# Altium PCB SchaltmichAus.PcbDoc
Units mm, origin at the board's own origin, x right, y up, seen from the top; angles counter-clockwise.
Board outline 104.14 x 59.91 mm, 2 copper layers (Top Layer, Bottom Layer); 20 components, 16 nets, 111 pads, 9 vias.
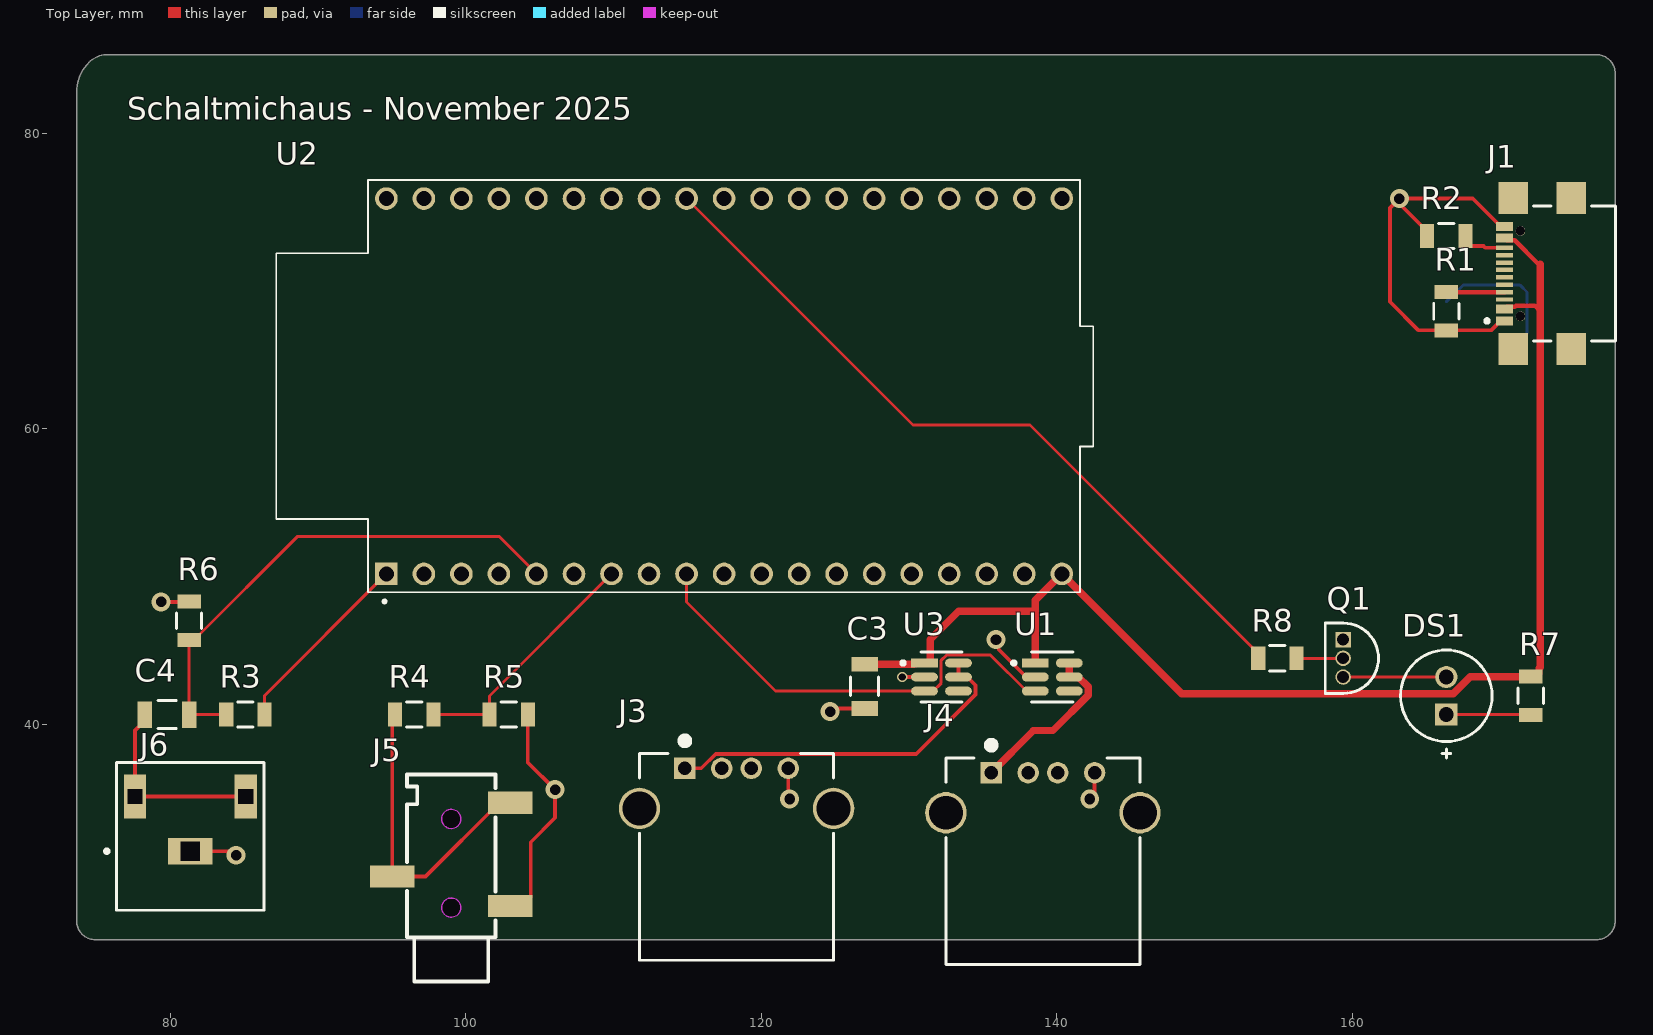
[diagram p0: Top Layer view]
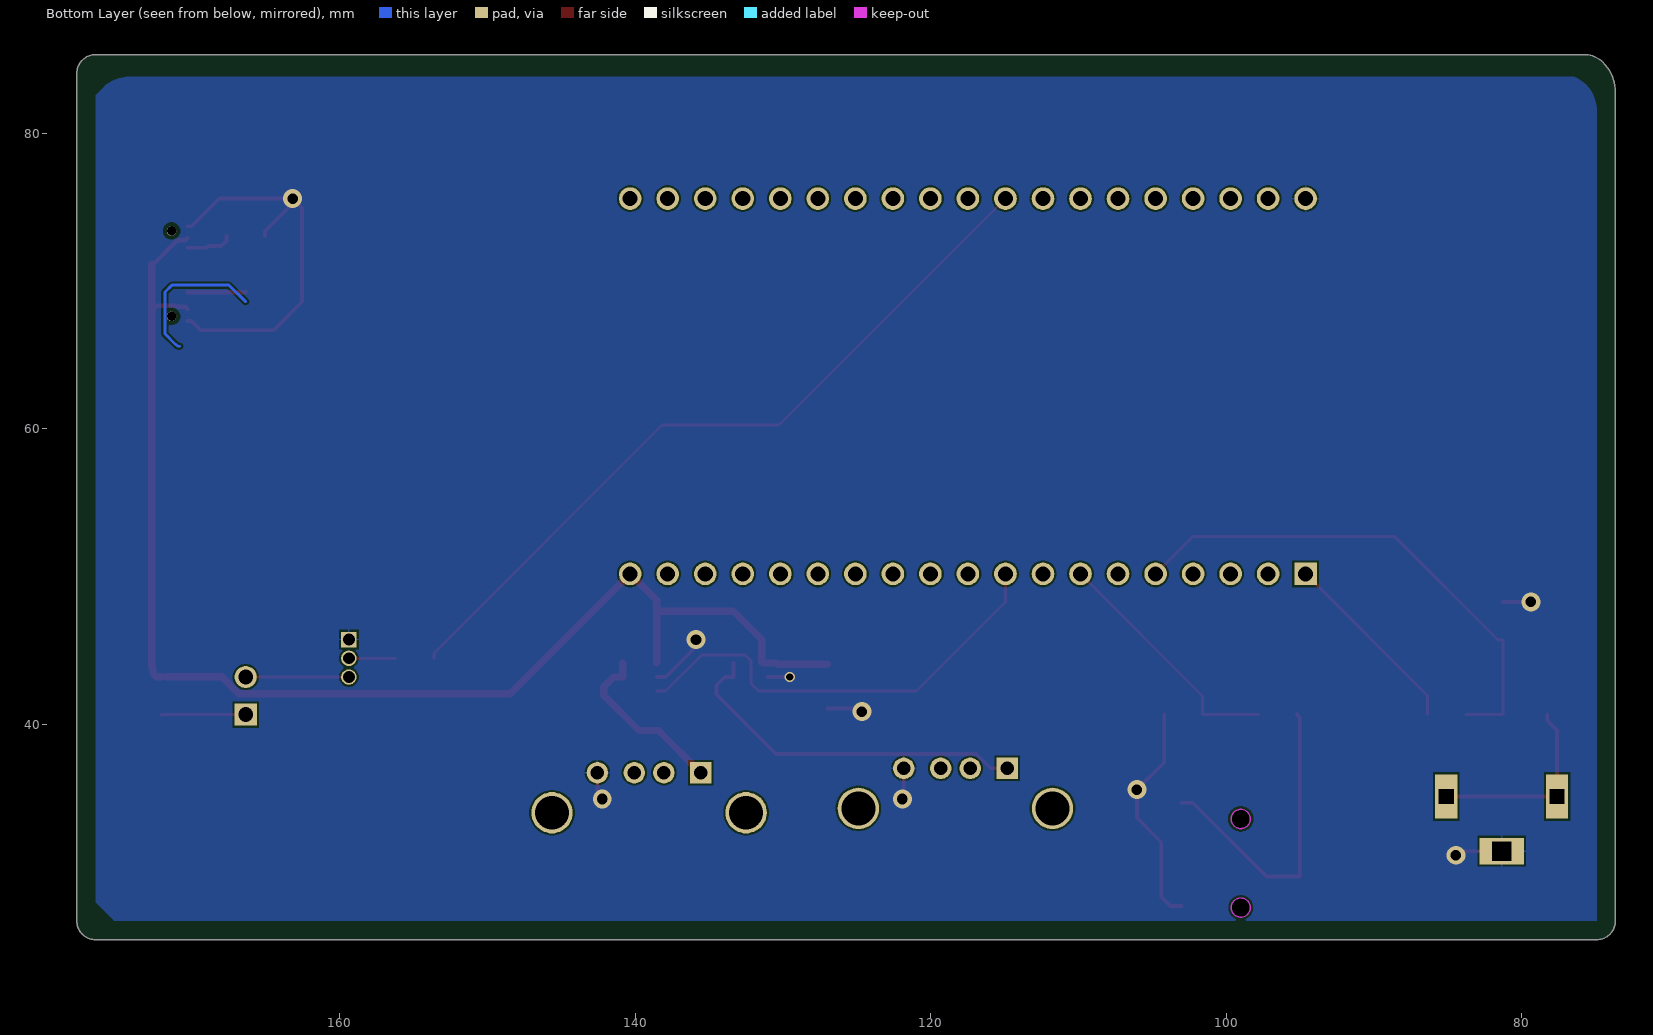
[diagram p1: Bottom Layer view, seen from below]
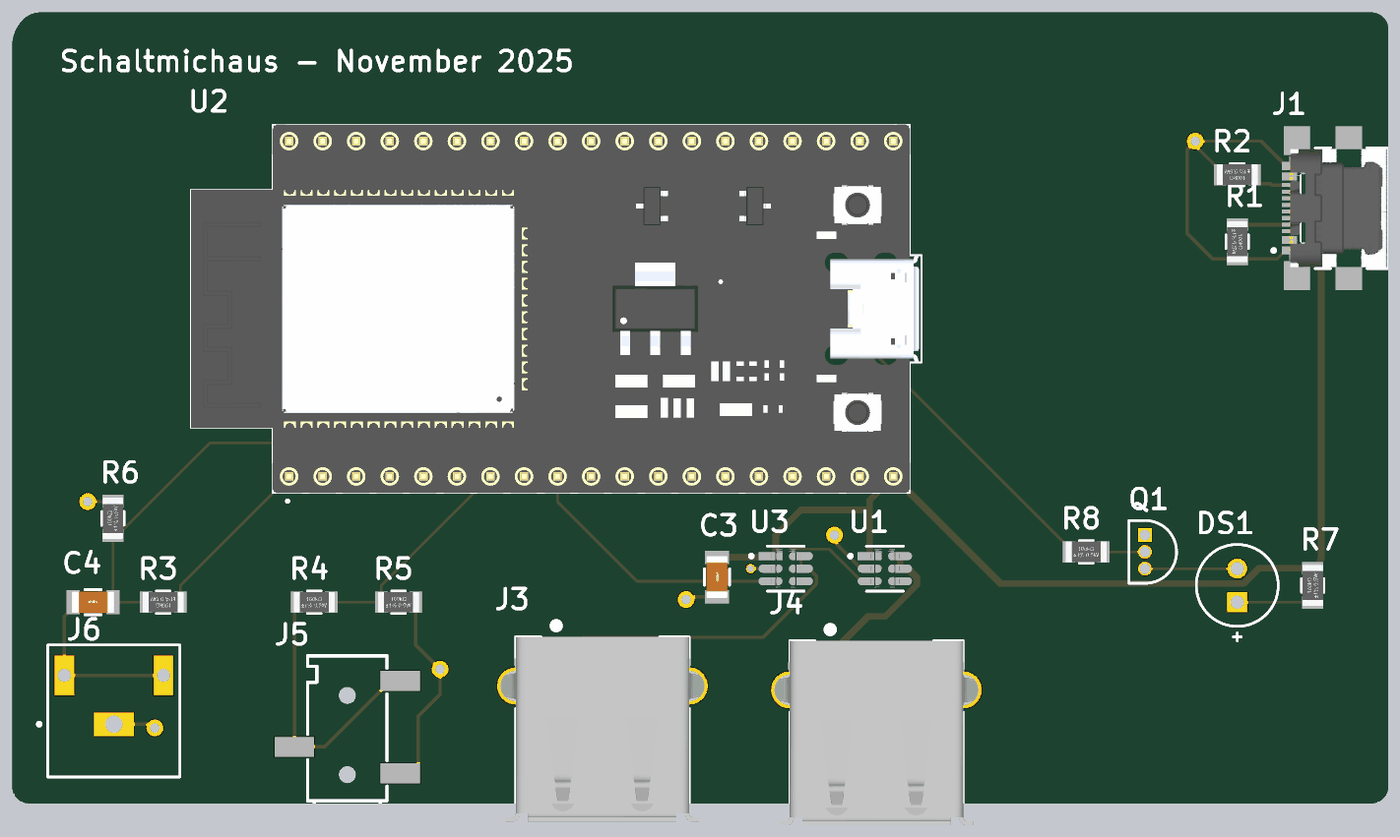
[diagram p2: 3D render of the assembled board from above, using the file's embedded part models]

## Layer stack, top to bottom
Top Solder: solder mask 0.0102, Solder Resist, Dk 3.5
Top Layer: signal copper 0.0356
Dielectric 1: dielectric 0.32, FR-4, Dk 4.8
Bottom Layer: signal copper 0.0356
Bottom Solder: solder mask 0.0102, Solder Resist, Dk 3.5

## Board outline
73.66,26.67 73.66,82.762 cw(c76.515,82.762) 74.496,84.78 cw(c75.775,83.501) 75.775,85.31 176.53,85.31 cw(c176.53,84.04) 177.8,84.04 177.8,26.67 cw(c176.53,26.67) 176.53,25.4 74.93,25.4 cw(c74.93,26.67)

## Design rules (kind name [scope] priority, off if disabled: settings)
BoardOutlineClearance [All] p1: gap=0.2 ignorepadtopadclearanceinfootprint=FALSE
Clearance [All] p1: gap=0.127 ignorepadtopadclearanceinfootprint=FALSE except(0.25: Arc-Hole Track-Hole SMDPad-Hole THPad-Hole Via-Hole Fill-Hole Poly-Hole Region-Hole Text-Hole)
ComponentClearance [All] p1: gap=0.127 collisioncheckmode=3 verticalgap=0.127 showdistances=TRUE
DiffPairsRouting [All] p1: maxlimit=0.254 minlimit=0.127 mostfreqgap=0.127 toplayer_minwidth=0.127 toplayer_maxwidth=25.4 toplayer_prefwidth=0.127 bottomlayer_minwidth=0.127 bottomlayer_maxwidth=25.4 bottomlayer_prefwidth=0.127 maxuncoupledlength=12.7
Height [All] p1: minheight=0 maxheight=1816.048 prefheight=12.7
HoleSize [All] p1: absolutevalues=TRUE maxlimit=6.3 minlimit=0.3 maxpercent=80.000 minpercent=20.000
HoleToHoleClearance [All] p1: gap=0.25 allowstackedmicrovias=FALSE
MinimumAnnularRing [All] p1: minimumring=0.076
MinimumSolderMaskSliver [All] p1: minsoldermaskwidth=0
PlaneClearance [All] p1: clearance=0.127
PlaneConnect PlaneConnectPowerPads [InPadClass('PowerPads')] p1: planeconnectstyle=Direct reliefexpansion=0.508 reliefentries=4 reliefconductorwidth=0.254 reliefairgap=0.254
PlaneConnect [All] p2: pad.planeconnectstyle=Relief pad.reliefexpansion=0.3 pad.reliefentries=4 pad.reliefconductorwidth=0.127 pad.reliefairgap=0.127 via.planeconnectstyle=Direct via.reliefexpansion=0.3 via.reliefentries=4 via.reliefconductorwidth=0.127 via.reliefairgap=0.127
PolygonConnect PolygonConnectPowerPads [All vs (InPadClass('PowerPads'))] p1: connectstyle=Direct reliefconductorwidth=0.254 reliefentries=4 polygonreliefangle="90 Angle" airgapwidth=0.254
PolygonConnect [All] p2: thpad.connectstyle=Relief thpad.reliefconductorwidth=0.127 thpad.reliefentries=4 thpad.polygonreliefangle="90 Angle" thpad.airgapwidth=0.127 smdpad.connectstyle=Relief smdpad.reliefconductorwidth=0.127 smdpad.reliefentries=4 smdpad.polygonreliefangle="90 Angle" smdpad.airgapwidth=0.127 via.connectstyle=Direct via.reliefconductorwidth=0.127 via.reliefentries=4 via.polygonreliefangle="90 Angle" via.airgapwidth=0.127
RoutingVias [All] p1: holewidth=0.3 width=0.6 viastyle="Through Hole" minholewidth=0.3 minwidth=0.6 maxholewidth=0.6 maxwidth=6.6
SilkToSilkClearance [All] p1: silktosilkclearance=0
SilkToSolderMaskClearance [IsPad] p1: minsilkscreentomaskgap=0.127 clearancetoexposedcopper=TRUE
SolderMaskExpansion [All] p1: expansion=0.075 istentingtop=FALSE
SupplyNets "Schematic Supply Nets_2" [InNet('+5')] p1: voltage=0.000
SupplyNets "Schematic Supply Nets_1" [InNet('3V3')] p2: voltage=0.000
SupplyNets "Schematic Supply Nets" [InNet('GND')] p3: voltage=0.000
Width [All] p1: maxlimit=25.4 minlimit=0.127 preferedwidth=0.127 minimp=50.000000 maximp=50.000000 favimp=50.000000
20 further rules are at their usual default settings.

## Components (designator, comment, footprint, x,y, rotation, side; value= is the part's Value field where it differs from the comment)
C3 "1uF" FP-CC1206-FD-MFG 127,42.545 r270 top
C4 "100nF" FP-CC1206-FD-MFG 79.78,40.64 r0 top
DS1 "IR333C" EVRL-IR333C 166.37,41.91 r90 top
J1 "USB4110-GF-A" FP-USB4110-GF-A-MFG 173.99,70.485 r90 top
J3 "292303-1" TE-292303-1_V 118.33,35.856 r0 top
J4 "292303-1" TE-292303-1_V 139.065,35.56 r0 top
J5 "PJ-320B Headphone Jack" "New footprint 1" 99.06,30.48 r180 top
J6 "PJRAN1X1U01X" SWIT-PJRAN1X1U01X_V 81.356,31.394 r0 top
Q1 "2N3904BU" FAIR-TO-92 159.385,45.72 r270 top
R1 "5k1" FP-CRGP1206-IPC_C 166.37,67.945 r270 top value=100KΩ
R2 "5k1" FP-CRGP1206-IPC_C 166.37,73.025 r180 top value=100KΩ
R3 "1Meg" FP-CRGP1206-IPC_C 85.09,40.64 r180 top value=100KΩ
R4 "47k" FP-CRGP1206-IPC_C 96.52,40.64 r0 top value=100KΩ
R5 "10k" FP-CRGP1206-IPC_C 102.901,40.64 r0 top value=100KΩ
R6 "1Meg" FP-CRGP1206-IPC_C 81.28,46.99 r90 top value=100KΩ
R7 "100R" FP-CRGP1206-IPC_C 172.085,41.91 r90 top value=100KΩ
R8 "110R" FP-CRGP1206-IPC_C 154.94,44.45 r0 top value=100KΩ
U1 "TPS22917DBVR" FP-DBV0006A-IPC_A 139.7,43.18 r0 top
U2 "ESP32-DEVKITC" MODULE_ESP32-DEVKITC 117.475,62.865 r90 top
U3 "TPS22917DBVR" FP-DBV0006A-IPC_A 132.2,43.18 r0 top

## Footprints (in the part's own frame and the unit in brackets; to place one, negate y for a bottom-side part, rotate by r counter-clockwise, add the part's x,y. Pads: shape width x height; smd on the part's side, far side on the other; paste and mask are expansions set on the pad)
EVRL-IR333C [mm] "TH, 2-Leads, Radius 2.95mm, Pitch 2.54mm"
  rect 1.5x1.5 hole 1: 1(-1.27,0)
  round 1.5 hole 1: 2(1.27,0)
  silkscreen extent -4.2,-3.1 3.1,3.1, body extent -2.95,-2.95 2.95,2.95, height 10.4
FAIR-TO-92 [mm] "TO, 3-Leads, Body Dia 4.79mm, Pitch 1.27mm"
  rect 1.05x1.05 hole 0.8 mask+0.05: 1(0,0)
  round 1.05 hole 0.8 mask+0.05: 2(1.27,0) 3(2.54,0)
  silkscreen extent -1.11,-1.21 3.65,2.4, body extent -1.11,-1.21 3.65,2.4, height 5.33
FP-CC1206-FD-MFG [mm]
  rect 1x1.8 smd paste+0 mask+0: 1(-1.5,0) 2(1.5,0)
  silkscreen extent -0.63,-0.95 0.63,0.95, body extent -2.32,-1.38 2.32,1.38, height 0.25
FP-CRGP1206-IPC_C [mm]
  rect 0.956x1.61 smd paste+0 mask+0: 1(-1.301,0) 2(1.301,0)
  silkscreen extent -0.52,-0.85 0.52,0.85, body extent -1.88,-0.95 1.88,0.95, height 0.25
FP-DBV0006A-IPC_A [mm]
  rect 1.805x0.61 smd paste+0 mask+0: 1(-1.15,0.95)
  rrect100% 1.805x0.61 smd paste+0 mask+0: 2(-1.15,0) 3(-1.15,-0.95) 4(1.15,-0.95) 5(1.15,0) 6(1.15,0.95)
  silkscreen extent -2.73,-1.7 1.4,1.7, body extent -2.55,-1.95 2.55,1.95, height 0.25
FP-USB4110-GF-A-MFG [mm]
  rect 2.18x2 smd paste+0 mask+0: 1(-5.11,3.105) 2(5.11,3.105) 3(-5.11,-0.825) 4(5.11,-0.825)
  rect 0.6x1.15 smd paste+0 mask+0: A1-B12(-3.2,3.68) A4-B9(-2.4,3.68) B1-A12(3.2,3.68) B4-A9(2.4,3.68)
  rect 0.3x1.15 smd paste+0 mask+0: A5(-1.25,3.68) A6(-0.25,3.68) A7(0.25,3.68) A8(1.25,3.68) B5(1.75,3.68) B6(0.75,3.68) B7(-0.75,3.68) B8(-1.75,3.68)
  round 0.65 hole 0.65 unplated paste-2539.97 mask+0: ""(-2.89,2.605) ""(2.89,2.605)
  silkscreen extent -4.57,-3.83 4.57,4.99, body extent -6.3,-3.92 6.3,4.36, height 0.25
MODULE_ESP32-DEVKITC [mm]
  rect 1.53x1.53 / inner round 1.53 / far side rect 1.53x1.53 hole 1.02: 1(-12.7,22.85)
  round 1.53 hole 1.02: 2(-12.7,20.31) 3(-12.7,17.77) 4(-12.7,15.23) 5(-12.7,12.69) 6(-12.7,10.15) 7(-12.7,7.61) 8(-12.7,5.07) 9(-12.7,2.53) 10(-12.7,-0.01) 11(-12.7,-2.55) 12(-12.7,-5.09) 13(-12.7,-7.63) 14(-12.7,-10.17) 15(-12.7,-12.71) 16(-12.7,-15.25) 17(-12.7,-17.79) 18(-12.7,-20.33) 19(-12.7,-22.87) 20(12.7,-22.87) 21(12.7,-20.33) 22(12.7,-17.79) 23(12.7,-15.25) 24(12.7,-12.71) 25(12.7,-10.17) 26(12.7,-7.63) 27(12.7,-5.09) 28(12.7,-2.55) 29(12.7,-0.01) 30(12.7,2.53) 31(12.7,5.07) 32(12.7,7.61) 33(12.7,10.15) 34(12.7,12.69) 35(12.7,15.23) 36(12.7,17.77) 37(12.7,20.31) 38(12.7,22.85)
  silkscreen extent -14.67,-25 13.95,30.3, body extent -13.97,-24.8 13.97,30.3, height 6.69
"New footprint 1" [mm]
  rect 3x1.5 smd: 1(-3.961,2.805) 2(4.039,0.805) 3(-3.961,-4.195)
  Keep-Out Layer board cut-out: 0.689,2.905 0.625,2.623 0.444,2.397 0.184,2.271 -0.106,2.271 -0.366,2.397 -0.547,2.623 -0.611,2.905 -0.611,2.905 -0.547,3.187 -0.366,3.413 -0.106,3.538 0.184,3.538 0.444,3.413 0.625,3.187 0.689,2.905
  Keep-Out Layer board cut-out: 0.689,-3.095 0.625,-3.377 0.444,-3.603 0.184,-3.729 -0.106,-3.729 -0.366,-3.603 -0.547,-3.377 -0.611,-3.095 -0.611,-3.095 -0.547,-2.813 -0.366,-2.587 -0.106,-2.462 0.184,-2.462 0.444,-2.587 0.625,-2.813 0.689,-3.095
  Keep-Out Layer circle w0.025: c0.039,2.905 r0.65
  Keep-Out Layer circle w0.025: c0.039,-3.095 r0.65
  Keep-Out Layer region: 0.689,2.905 0.625,2.623 0.444,2.397 0.184,2.271 -0.106,2.271 -0.366,2.397 -0.547,2.623 -0.611,2.905 -0.611,2.905 -0.547,3.187 -0.366,3.413 -0.106,3.538 0.184,3.538 0.444,3.413 0.625,3.187 0.689,2.905
  Keep-Out Layer region: 0.689,-3.095 0.625,-3.377 0.444,-3.603 0.184,-3.729 -0.106,-3.729 -0.366,-3.603 -0.547,-3.377 -0.611,-3.095 -0.611,-3.095 -0.547,-2.813 -0.366,-2.587 -0.106,-2.462 0.184,-2.462 0.444,-2.587 0.625,-2.813 0.689,-3.095
  silkscreen extent -2.96,-6.1 3.04,7.9
SWIT-PJRAN1X1U01X_V [mm] "Jack, 3-Leads, Body 19.5x10mm"
  rect 3x1.8 hole 1.3 square paste-2539.97: 1(0,0)
  rect 1.5x3 hole 1 square paste-2539.97: 2(-3.75,3.7) 3(3.75,3.7)
  silkscreen extent -5.77,-4 5,6, body extent -5,-13.5 5,6, height 13
TE-292303-1_V [mm] "THD, 4-Leads, Body 13.13x14mm, Pitch 2.5mm"
  rect 1.45x1.45 hole 0.92: 1(-3.5,1.144)
  round 1.45 hole 0.92: 2(-1,1.144) 3(1,1.144) 4(3.5,1.144)
  round 2.8 hole 2.3: 5(-6.57,-1.566) 6(6.57,-1.566)
  silkscreen extent -6.57,-11.85 6.57,3.25, body extent -8.12,-11.85 8.12,2.15, height 7.72

## Part data
C3 C4: library part CMP-03422-001420-1, "CAP CER 10UF 50V X5R 1206", Capacitance=10uF, Case/Package=1206, Dielectric=X5R, Max Operating Temperature=85°C, Min Operating Temperature=-55°C, Tolerance=10%, Voltage Rating=50V, Halogen Free="Halogen Free", Lead Free="Lead Free", Length=0.126inch, Mount="Surface Mount", Packaging="Tape and Reel", RoHS Compliant=Yes, Thickness=0.075inch, Voltage Rating (DC)=50V, Width=0.063inch
DS1: library part CMP-2000-05108-1, "Infrared LED, 1.2 V, -40 to 85 degC, 2-Pin Radial, RoHS, Bulk", Forward Current=20mA, Forward Voltage=1.2V, Illumination Color=Infrared, Manufacturer="Everlight Electronics", Maximum Forward Current=1A, Maximum Operating Temperature=+85C, Minimum Operating Temperature=-40C, Package / Case=T-13/4, Power Rating=150mW, Brand=Everlight, Datasheet URL=http://www.everlight.com/file/ProductFile/201407061521223111.pdf, Datasheet Version=May-13, Factory Pack Quantity=500, Lens Shape=Dome, Manufacturer URL=http://www.everlight.com/, Mounting Style=ThroughHole, Operating Voltage=1.2V, Product Category=InfraredEmitters, Radiant Intensity=12mW/sr, RoHS=Details, Viewing Angle=40deg, Wavelength=940nm
J1: library part CMP-245163-000002-1, "CONN USB 2.0 TYPE-C R/A SMT", Current Rating=3/4.25/1.25/0.25A, Manufacturer=GCT, Package=0, Temperature="-40°C to +85°C", Temperature Range High=+85°C, Temperature Range Low=-40°C, Voltage Rating=20V, Automotive=No, Category=Conn, ComponentLink2Description=Datasheet, ComponentLink2URL=https://gct.co/files/drawings/usb4110.pdf, Conn Orientation="Right Angle", Contact Material=Gold,Nickel, Device Class L1=Connectors, Device Class L2="USB Connectors", Device Class L3=unset, Digikey Description="CONN USB 2.0 TYPE-C R/A SMT", Height=3.46mm, Is Female=yes, Lead Free=Yes, Manufacturer Part Number=USB4110-GF-A, Number Of Contacts=16, Octopart=https://octopart.com/usb4110-gf-a-gct-103941985, RoHS=TRUE, Shielding=true, Standoff Height=0.1mm, Usb Standard="USB 2.0"
J3 J4: library part CMP-2000-05404-1, "1 Port Right Angle Through Hole Mount Female Type A USB Connector, 4 Position, -55 to 85 degC, RoHS, Tube", Manufacturer="TE Connectivity", Package Description="4-Pin Through Hole Device, Body 14 x 13.13 mm, Pitch 2.5 mm", Connector Mounting=PCB, Connector Type=USBA, Contact Material=Copper, Contact Plating=Gold, Contact Termination Type=Solder, Datasheet URL=http://www.farnell.com/cad/1653030.pdf, Datasheet Version=Feb-12, Gender=Receptacle, Manufacturer URL=http://www.te.com/, No. of Contacts=4, Package Reference=292303-1, SVHC=NoSVHC(16-Jun-2014)
J5: library part CMP-002-00071-2, "200mA 3.5mm Headphone Jack 30V SMD Audio Connectors ROHS"
J6: library part CMP-1772-00003-1, "Female Phono Jack, 3 Position, Height 13 mm, Tail Length 4 mm, RoHS, Bulk", Capacitance="100 nF", Case\Package=Radial, Max Operating Temperature="125 degC", Min Operating Temperature="-55 degC", Package Quantity=500, Tolerance=10%, Type (Capacitors)=X7R, Voltage Rating="50 V", ComponentLink1Description="Manufacturer URL", ComponentLink1URL=http://www.switchcraft.com/, ComponentLink2Description=Datasheet, ComponentLink2URL=http://www.conxall.com/Drawings/pjran1x1u__x_series_cd.pdf, DatasheetVersion="Rev. A, 01/2006", Height="3.18 mm", Lead Pitch="2.54 mm", Length="6.6 mm", Mount="Through Hole", PackageDescription="Female Phono Jack, 3 Position, Height 13 mm, Tail Length 4 mm", PackageReference=PJRAN1X1U01X, Packaging=Bulk, Pins=2, Radiation Hardening=No, REACH SVHC="No SVHC", RoHSCompliant=true, Voltage Rating (DC)="50 V", Width="5.08 mm"
Q1: library part CMP-2000-04944-1, "NPN General-Purpose Amplifier, 40 V VCEO, 0.2 A, -55 to 150 degC, 2-Pin TO-92, RoHS, Bulk", Manufacturer=FairchildSemiconductor, Maximum Collector Base Voltage=60V, Maximum Collector Emitter Saturation Voltage=0.2@1mA@10mA, Maximum Collector Emitter Voltage=40V, Maximum DC Collector Current=0.2A, Maximum Operating Frequency=300(Min)MHz, Maximum Power Dissipation=625mW, Minimum DC Current Gain=40@0.1mA@1V, Operating Temperature=-55to150degC, Package=3TO-92, Package Description="3-Pin Transistor Outline Package, Body Dia 4.79 mm, Pitch 1.27 mm", Package Reference=TO-92, Category=GPBJT, Datasheet URL=https://datasheet.ciiva.com/4722/2n3904-82270-4722369.pdf, Datasheet Version="Rev. 1.1.0, 10/2014", Manufacturer URL=https://www.fairchildsemi.com/, Mounting=ThroughHole, Packaging=Bulk, Pin Count=3, Rad Hard=No, Type=NPN
R1 R2 R3 R4 R5 R6 R7 R8: library part CMP-03211-001403-1, "CRGP1206 100KΩ 0.5W ±100ppm/°C 1% 200V", Ambient Temperature Range High=+70°C, Manufacturer=TE, Manufacturer Part Number=CRGP1206F100K, Package=CRGP1206, Power Rating=0.5W, Resistance=100KΩ, Temperature="-55°C to +155°C", Temperature Coefficient=±100ppm/°C, Temperature Range High=+155°C, Temperature Range Low=-55°C, Tolerance=0.01, Voltage Rating=200V, Automotive=No, Category=Res, ComponentLink2Description=Datasheet, ComponentLink2URL=https://www.mouser.com/datasheet/2/418/NG_DS_9-1773463-9_A-1358566.pdf, Composition="Thick Film", Device Class L1="Passive Components", Device Class L2=Resistors, Device Class L3="Chip SMD Resistors", Height=0.65mm, Ipc Land Pattern Name=RESC310155X55, Lead Free=Yes, Octopart=https://octopart.com/crgp1206f100k-te+connectivity-91018841, RoHS=TRUE, Series=CRGP
U1 U3: library part CMP-04912-000029-1, "IC PWR SWITCH P-CHAN 1:1 SOT23-6", Case/Package=SOT-23-6, Max Operating Temperature=125°C, Max Output Current=2A, Min Operating Temperature=-40°C, Fault Protection="Reverse Current", Interface=On/Off, Number of Channels=1, Number of Outputs=1, Output Configuration="High Side", Packaging="Tape and Reel"
U2: library part CMP-003-000000-1, "ESP32-WROOM-32UE series Transceiver; 802.11 b/g/n (Wi-Fi, WiFi, WLAN), Bluetooth Â® Smart Ready 4.x Dual Mode Evaluation Board", Package=None, Check_prices=https://www.snapeda.com/parts/ESP32-DEVKITC/Espressif+Systems/view-part/?ref=eda, Component Type=Standard, Design Item ID=ESP32-DEVKITC, MF="Espressif Systems", MP=ESP32-DEVKITC, Pin Count=38, SnapEDA_Link=https://www.snapeda.com/parts/ESP32-DEVKITC/Espressif+Systems/view-part/?ref=snap, Source=ESP32-DEVKITC.SchLib

## Via types
v1: diameter 1.27, hole 0.711, Top Layer to Bottom Layer, 8 vias
v2: diameter 0.7, hole 0.5, Top Layer to Bottom Layer, 1 vias

## Nets (pads, with @x,y where several pads share a name; then routed paths per layer and width w, separated by ;. In a path a pad name is that pad's centre, name@x,y a point inside that pad or via, vN(x,y) a via of type N, cw(c..) or ccw(c..) an arc to the next point about the centre after c; other vN are vias at no path point)
3V3: R3.1 U2.1 | length 12.9
  Top Layer w0.2: R3.1 86.391,41.931 U2.1
+5: C3.1 J1.A4-B9 J1.B4-A9 R7.2 U1.1 U2.19 U3.1 | length 90.1
  Top Layer w0.3: J1.A4-B9 170.46,68.235 171,68.235 171.085,68.32 172.345,68.32 172.72,67.945 ; J1.B4-A9 170.46,72.735 171,72.735 172.615,71.12 172.72,71.12
  Top Layer w0.5: C3.1 130.366,44.045 130.451,44.13 131.39,44.13 131.445,44.185 131.445,45.72 133.35,47.625 138.55,47.625 ; U1.1 138.55,47.625 ; R7.2@171.758,43.211 167.995,43.211 166.837,42.053 148.457,42.053 U2.19 138.55,48.37 138.55,47.625 ; R7.2 172.412,43.211 172.64,43.439 172.64,43.766 172.72,43.846 172.72,67.945 172.72,71.12
GND: C3.2 J1.A1-B12 J1.B1-A12 J3.4 J4.4 J5.1 J6.1 Q1.1 R1.2 R2.2 R5.2 R6.2 U1.2 U2.38 U3.2 | length 60.1
  Top Layer w0.254: v1(79.375,48.26) 81.249,48.26 R6.2 ; J6.1 84.176,31.394 v1(84.455,31.115) ; J5.1 103.771,27.675 104.394,28.298 104.394,32.004 106.045,33.655 v1(106.045,35.56) 104.202,37.403 R5.2 ; J3.4 121.83,35.015 v1(121.92,34.925) ; v1@124.46,40.64 124.865,41.045 C3.2 ; v2(129.54,43.18) U3.2 ; v1(135.89,45.72) 136.084,45.526 136.084,45.028 137.933,43.18 U1.2 ; v1(142.24,34.925) 142.565,35.25 J4.4 ; R2.2 165.069,73.352 163.389,75.031 163.389,75.371 v1(163.195,75.565) ; J1.A1-B12 170.035,67.285 169.394,66.644 R1.2 164.496,66.644 162.56,68.58 162.56,74.93 v1(163.195,75.565) ; J1.B1-A12 170.035,73.685 168.155,75.565 v1(163.195,75.565)
  other v1: 124.663,40.843
NetC4_1: C4.1 J6.2 J6.3 | length 13.3
  Top Layer w0.254: C4.1 78.28,40.24 77.606,39.566 J6.2 J6.3
NetC4_2: C4.2 R3.2 R6.1 U2.5 | length 35
  Top Layer w0.2: R3.2 C4.2 R6.1 81.607,45.689 88.623,52.705 102.245,52.705 U2.5
NetDS1_1: DS1.1 R7.1 | length 5.7
  Top Layer w0.2: DS1.1 172.054,40.64 R7.1
NetDS1_2: DS1.2 Q1.3 | length 7
  Top Layer w0.2: Q1.3 DS1.2
NetJ1_A5: J1.A5 R1.1 | length 3.9
  Top Layer w0.3: R1.1 166.381,69.235 J1.A5
NetJ1_B5: J1.B5 R2.1 | length 3.2
  Top Layer w0.254: R2.1 167.671,72.698 168.022,72.347 168.886,72.347 168.998,72.235 J1.B5
NetJ3_1: J3.1 U3.5 U3.6 | length 24.7
  Top Layer w0.254: J3.1 115.945,37 116.924,37.979 130.487,37.979 134.507,41.998 134.507,42.621 133.948,43.18 U3.5 U3.6
NetJ4_1: J4.1 U1.5 U1.6 | length 11.8
  Top Layer w0.5: J4.1 138.424,39.563 139.746,39.563 142.13,41.948 142.13,42.512 141.463,43.18 U1.5 U1.6
NetJ5_2: J5.2 J5.3 R4.1 | length 21.1
  Top Layer w0.254: R4.1 95.021,40.442 J5.2 97.271,29.675 102.271,34.675 J5.3
NetQ1_2: Q1.2 R8.2 | length 3.1
  Top Layer w0.2: R8.2 Q1.2
NetR4_2: R4.2 R5.1 U2.7 | length 16.7
  Top Layer w0.2: R4.2 R5.1 101.6,41.9 U2.7
NetR8_1: R8.1 U2.30 | length 51.8
  Top Layer w0.2: U2.30 130.277,60.233 138.183,60.233 153.639,44.777 R8.1
NetU1_3: U1.3 U2.9 U3.3 | length 30.9
  Top Layer w0.2: U2.9 114.935,50.155 114.935,48.26 120.965,42.23 U3.3 131.647,42.23 132.179,42.762 132.179,44.309 132.532,44.662 135.52,44.662 137.952,42.23 U1.3
pads on no net: J1. J1.1 J1.2 J1.3 J1.4 J1.A6 J1.A7 J1.A8 J1.B6 J1.B7 J1.B8 J3.2 J3.3 J3.5 J3.6 J4.2 J4.3 J4.5 J4.6 U1.4 U2.2 U2.3 U2.4 U2.6 U2.8 U2.10 U2.11 U2.12 U2.13 U2.14 U2.15 U2.16 U2.17 U2.18 U2.20 U2.21 U2.22 U2.23 U2.24 U2.25 U2.26 U2.27 U2.28 U2.29 U2.31 U2.32 U2.33 U2.34 U2.35 U2.36 U2.37 U3.4
copper on no net: | length 10.3
  Bottom Layer w0.2: 166.37,68.58 167.494,69.704 171.368,69.704 171.839,69.233 171.839,66.414 171.116,65.691 171.078,65.691 170.957,65.57 170.835,65.57

## Polygon pours and split planes (outlines as drawn)
GND on Bottom Layer "GND_L02_P001" (solid, pour order 1): 74.93,81.498 cw(c77.47,81.498) 76.441,83.82 174.208,83.82 cw(c174.208,81.28) 176.004,83.076 176.53,82.55 176.53,27.94 175.26,26.67 74.93,26.67

## Silkscreen, mask and mechanical layers (free items; w line width, h text height)
Top Overlay:
  text "Schaltmichaus - November 2025" at 77.089,80.899 h1.52
Mechanical 1:
  lines w0.254: 73.66,26.67 ccw(c74.93,26.67) 74.93,25.4 176.53,25.4 ccw(c176.53,26.67) 177.8,26.67 177.8,84.04 ccw(c176.53,84.04) 176.53,85.31 171.998,85.31 76.985,85.31 75.775,85.31 ccw(c75.775,83.501) 74.496,84.78 ccw(c76.515,82.762) 73.66,82.762 73.66,78.74 73.66,26.67

## Text inside footprints (layer, text, board x,y; h text height)
J6: Mechanical 6 "PCB Edge" at 86.817,25.806 h0.65